# EAGLE board MCU (EAGLE 9.6.0)
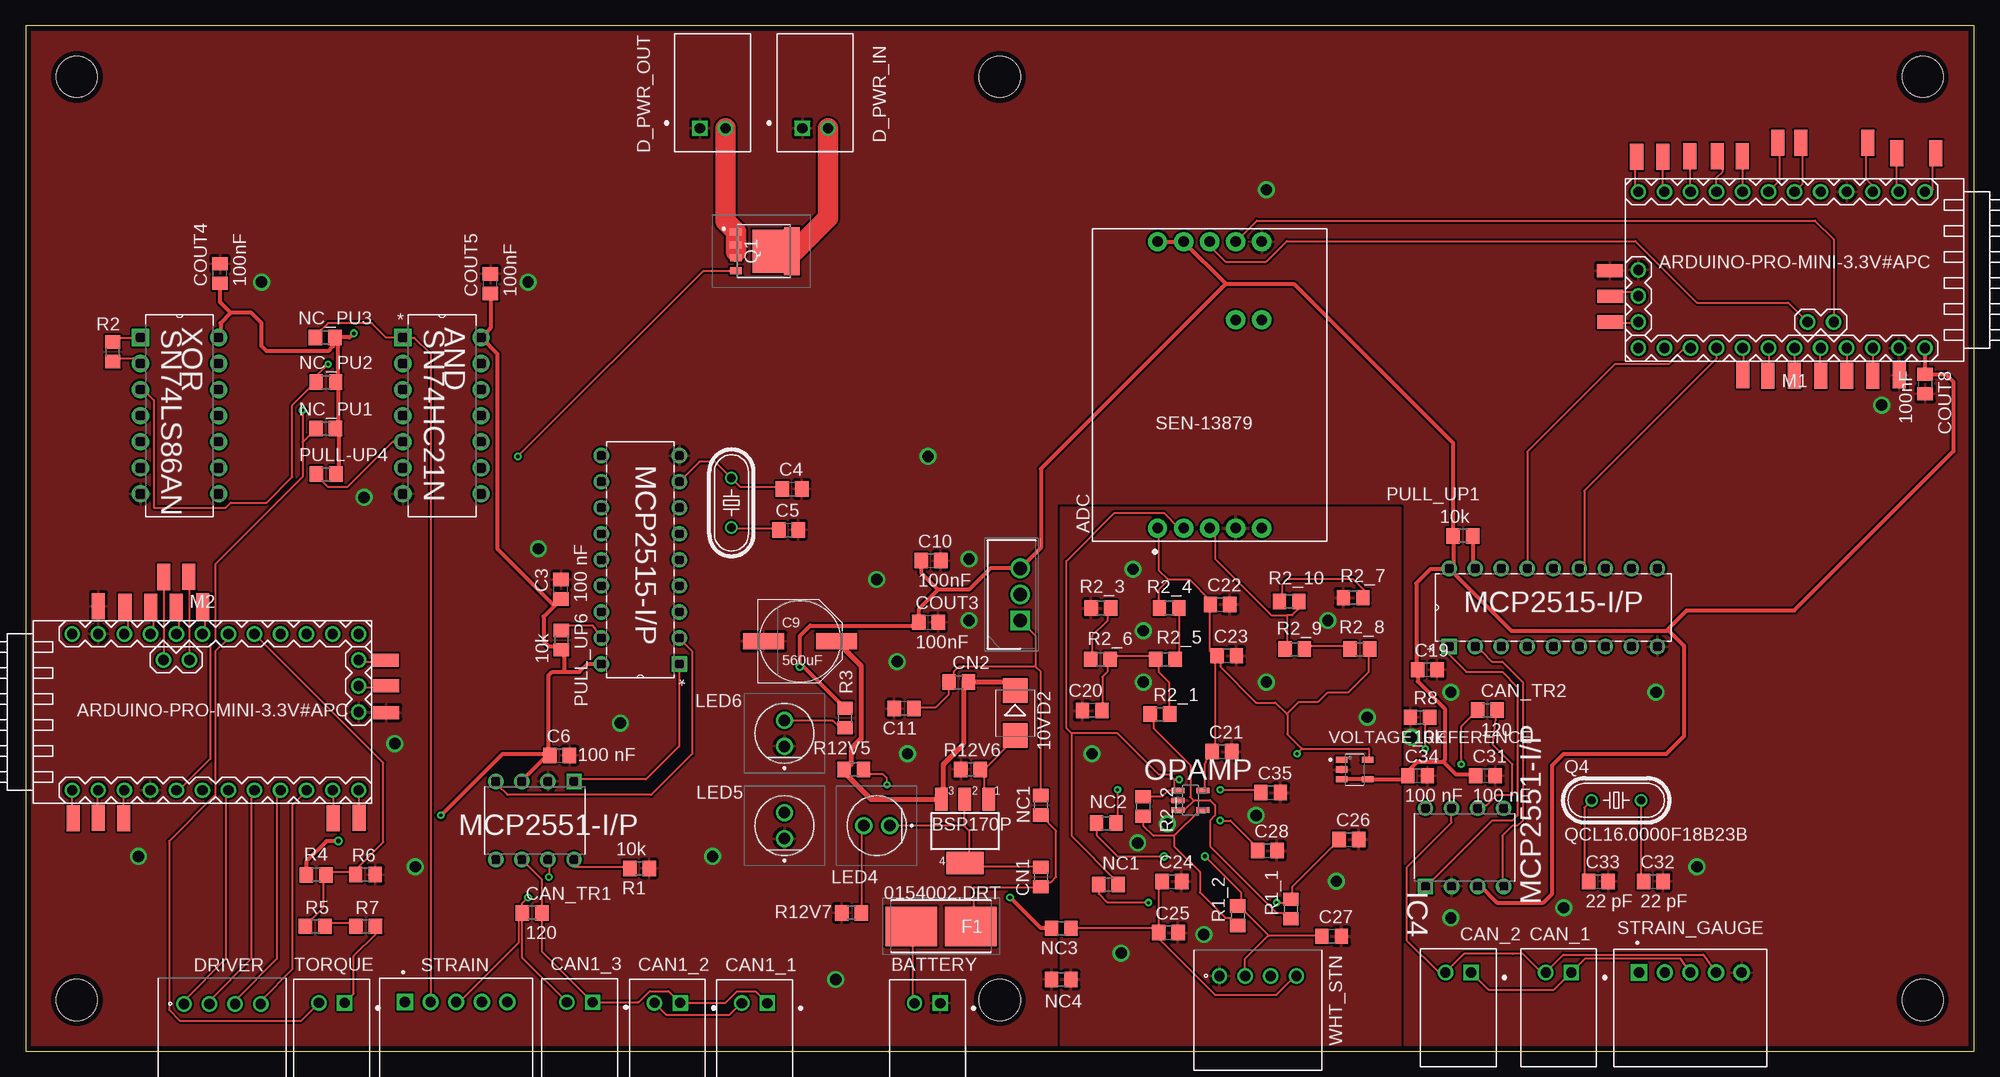
[diagram p0: board, top side]
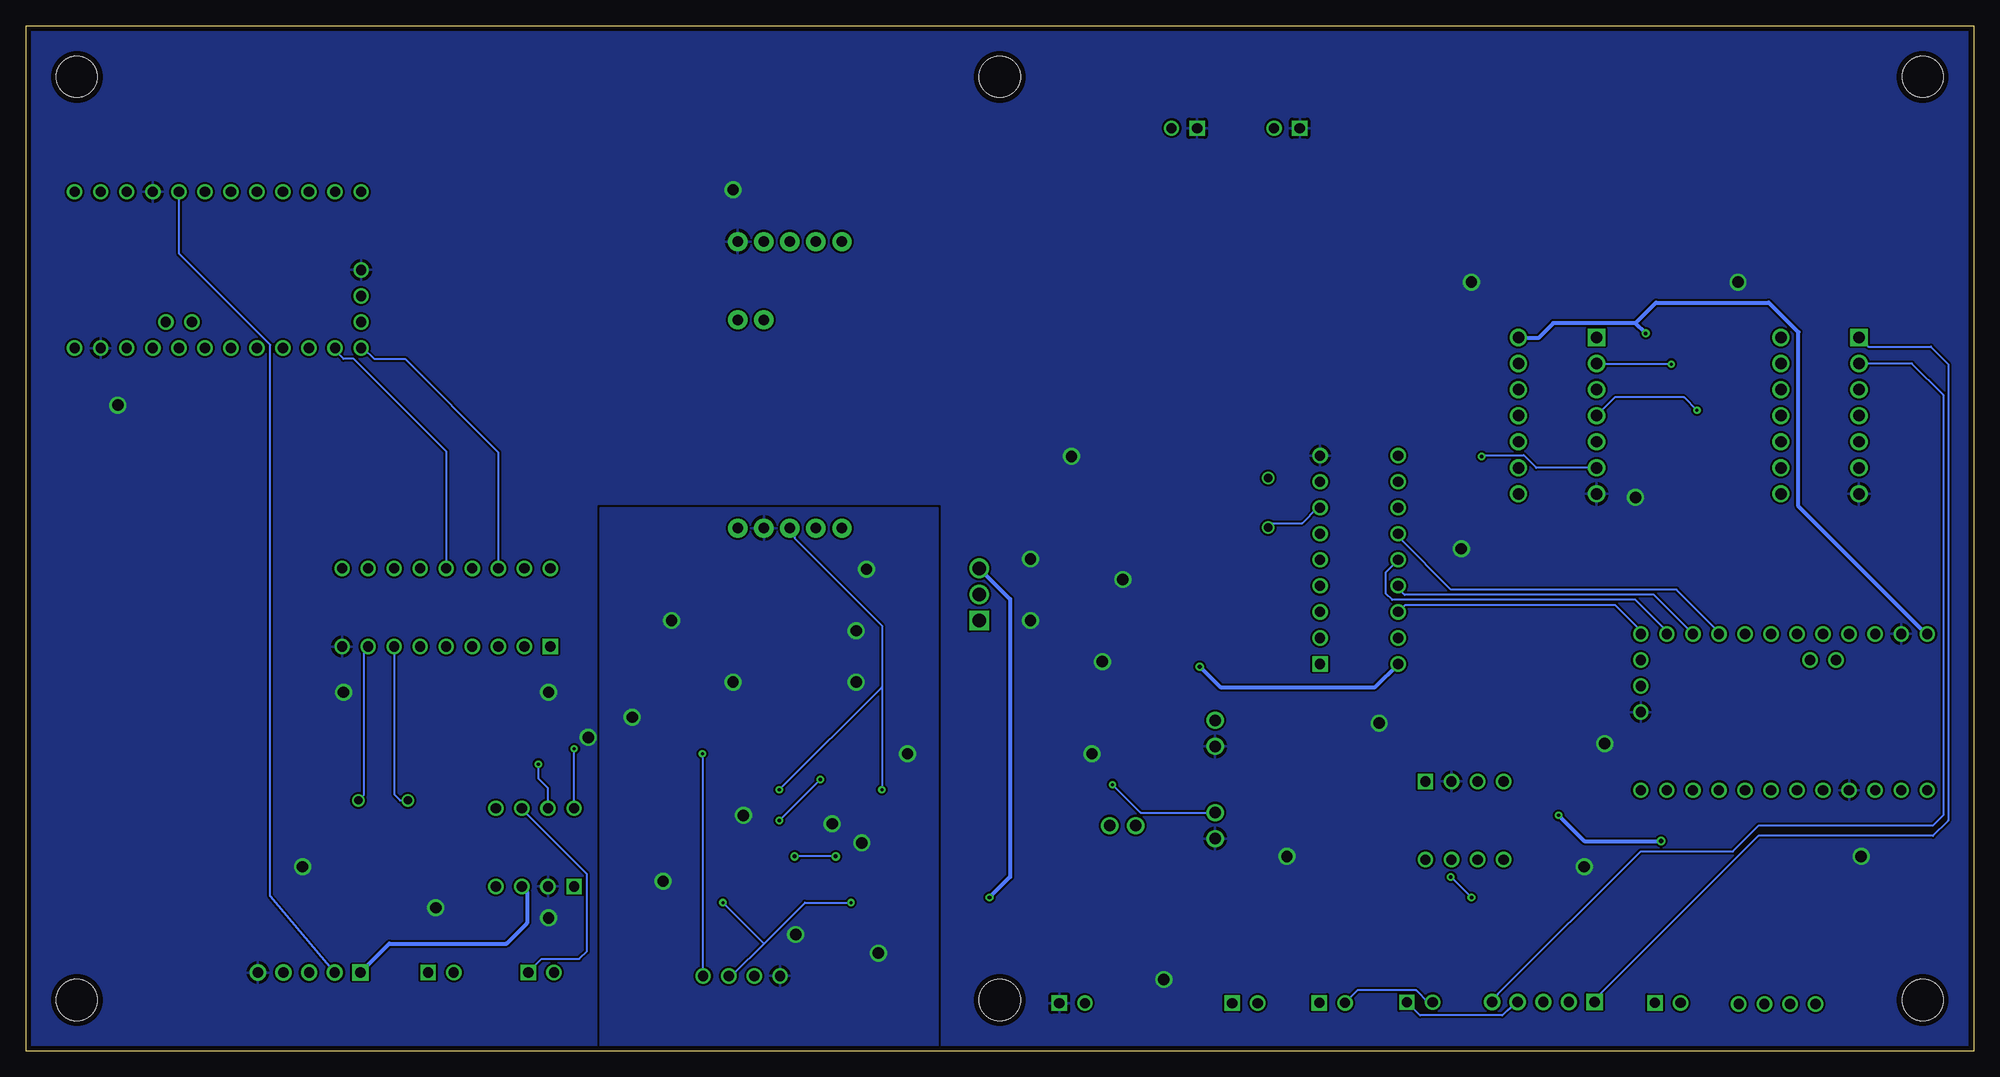
[diagram p1: board, bottom side, seen from below]

Size 190 x 100 mm. Coordinates in mm from the lower left corner, seen from the top.
Outline: 0,0 190,0 190,100 0,100 0,0
Copper layers (1*16): Top 0.035mm / dielectric 1.5mm / Bottom 0.035mm
Design rules "JLC_Vermilion2020": minimum track width 0.2mm, minimum drill 0.3mm, track to track 0.2mm, track to pad 0.3mm, pad to pad 0.3mm, via to via 0.2mm, smd to smd 0.2mm, copper to edge 0.5mm, drill to drill 0.25mm, minimum pad ring 0.2mm, minimum via ring 0.2mm, stop-mask expansion 0.055mm, vias tented up to drill 0.3mm, thermal gap 0.3mm
Net classes: 1 signal: width 0.3 mm, drill 0.4 mm, clearance 0.25 mm; 2 12V: width 1 mm, drill 1.1 mm, clearance 0.25 mm; 3 Driver Power: width 2 mm, drill 0.4 mm, clearance 0.5 mm
Holes 4 mm at 5,95 5,5 95,5 95,95 185,5 185,95

## Footprints (pad centres in the part's own frame; a part is rotated, then mirrored left to right if it is on the bottom)
SPARKFUN_SEN-13879 = drill 1.016 pad 1.88: 1 -13.97,5.08; 2 -13.97,2.54; 3 -13.97,0; 4 -13.97,-2.54; 5 -13.97,-5.08; 6 13.97,-5.08; 7 13.97,-2.54; 8 13.97,0; 9 13.97,2.54; 10 13.97,5.08; 11 6.35,-2.54; 12 6.35,-5.08
DIP254P762X508-14 = drill 1.118 square: 1 -7.62,15.24 | drill 1.118: 2 -7.62,12.7; 3 -7.62,10.16; 4 -7.62,7.62; 5 -7.62,5.08; 6 -7.62,2.54; 7 -7.62,0; 8 0,0; 9 0,2.54; 10 0,5.08; 11 0,7.62; 12 0,10.16; 13 0,12.7; 14 0,15.24
JST_S2B-XH-A(LF)(SN) = drill 1 square: 1 -1.25,0 | drill 1: 2 1.25,0
C0805 = smd 1.3 x 1.5: 1 -0.95,0; 2 0.95,0
PANASONIC_F = smd 4 x 1.6: + 3.55,0; - -3.55,0
R0805 = smd 1.3 x 1.5: 1 -0.95,0; 2 0.95,0
SMB = smd 2.4 x 2.4: A 2.2,0; C -2.2,0
S4B-XH-A(LF)(SN) = drill 1: 1 -0.02,3.75; 2 -0.02,1.25; 3 -0.02,-1.25; 4 -0.02,-3.75
FUSM9750X381N = smd 5.05 x 3.85: 1 -2.9,0; 2 2.9,0
DIP254P762X432-18 = drill 0.991 square: 1 -7.62,20.32 | drill 0.991: 2 -7.62,17.78; 3 -7.62,15.24; 4 -7.62,12.7; 5 -7.62,10.16; 6 -7.62,7.62; 7 -7.62,5.08; 8 -7.62,2.54; 9 -7.62,0; 10 0,0; 11 0,2.54; 12 0,5.08; 13 0,7.62; 14 0,10.16; 15 0,12.7; 16 0,15.24; 17 0,17.78; 18 0,20.32
DIP254P762X432-8 = drill 0.991 square: 1 -7.62,7.62 | drill 0.991: 2 -7.62,5.08; 3 -7.62,2.54; 4 -7.62,0; 5 0,0; 6 0,2.54; 7 0,5.08; 8 0,7.62
TO254P470X1028X1955-3P = drill 1.29 pad 1.935 square: 1 0,0 | drill 1.29 pad 1.935: 2 2.54,0; 3 5.08,0
TLHG5400 = drill 1.12 pad 1.68: 1 1.27,0; 2 -1.27,0
ARDUINO-PRO-MINI#APC = drill 1: J2.1 -1.27,5.08; J2.2 -3.81,5.08; J3.1 15.24,0; J3.2 15.24,2.54; J3.3 15.24,5.08; J6.1 -12.7,7.62; J6.2 -10.16,7.62; J6.3 -7.62,7.62; J6.4 -5.08,7.62; J6.5 -2.54,7.62; J6.6 0,7.62; J6.7 2.54,7.62; J6.8 5.08,7.62; J6.9 7.62,7.62; J6.10 10.16,7.62; J6.11 12.7,7.62; J6.12 15.24,7.62; J7.1 15.24,-7.62; J7.2 12.7,-7.62; J7.3 10.16,-7.62; J7.4 7.62,-7.62; J7.5 5.08,-7.62; J7.6 2.54,-7.62; J7.7 0,-7.62; J7.8 -2.54,-7.62; J7.9 -5.08,-7.62; J7.10 -7.62,-7.62; J7.11 -10.16,-7.62; J7.12 -12.7,-7.62
SOT95P284X119-5N = smd 1.27 x 0.533: 1 -1.219,0.94; 2 -1.219,0; 3 -1.219,-0.94; 4 1.219,-0.94; 5 1.219,0.94
SMD1,27-2,54 = smd 1.27 x 2.54: 1 0,0
PSMNR9040YLHX = smd 0.7 x 1.15: 1 -1.905,-2.737; 2 -0.635,-2.737; 3 0.635,-2.737; 4 1.905,-2.737 | smd 4.2 x 3.1: 5 0,0.437 | smd 4.7 x 1.5: 6 0,2.737
SOT223 = smd 1.219 x 2.235: 1 -2.311,-3.099; 2 0,-3.099; 3 2.311,-3.099 | smd 3.6 x 2.2: 4 0,3.099
HC49/S = drill 0.813: 1 -2.413,0; 2 2.413,0
JST_S5B-XH-A(LF)(SN) = drill 1 pad 1.59 square: 1 -5,0 | drill 1 pad 1.59: 2 -2.5,0; 3 0,0; 4 2.5,0; 5 5,0
SOT95P280X145-5N = smd 1.21 x 0.59: 1 -1.255,0.95; 2 -1.255,0; 3 -1.255,-0.95; 4 1.255,-0.95; 5 1.255,0.95

## Placement (x,y rotation side)
ADC  SEN-13879  [SPARKFUN_SEN-13879]  115.47,64.97 90 top
AND  SN74HC21N  [DIP254P762X508-14]  44.42,54.35 0 top
BATTERY  S2B-XH-A(LF)(SN)  [JST_S2B-XH-A(LF)(SN)]  87.94,4.69 180 top
C3  100 nF  [C0805]  52.2,45.04 90 top
C4  22 pF  [C0805]  74.74,54.84 0 top
C5  22 pF  [C0805]  74.39,50.84 0 top
C6  100 nF  [C0805]  52.09,28.84 0 top
C9  560uF  [PANASONIC_F]  75.52,39.98 0 top
C10  100nF  [C0805]  88.29,47.84 0 top
C11  0.33uF  [C0805]  85.66,33.42 180 top
C19  4.7uF  [C0805]  136.71,37.2 0 top
C20  100nF  [C0805]  104.02,33.22 180 top
C21  4.7uF  [C0805]  116.67,29.22 0 top
C22  4.7uF  [C0805]  116.49,43.57 0 top
C23  100nF  [C0805]  117.14,38.57 0 top
C24  4.7uF  [C0805]  111.79,16.57 0 top
C25  100nF  [C0805]  111.44,11.57 0 top
C26  100nF  [C0805]  129.06,20.67 0 top
C27  100nF  [C0805]  127.37,11.22 0 top
C28  100nF  [C0805]  121.09,19.57 0 top
C31  100 nF  [C0805]  142.37,26.87 0 top
C32  22 pF  [C0805]  158.74,16.57 0 top
C33  22 pF  [C0805]  153.39,16.57 0 top
C34  100 nF  [C0805]  135.75,26.87 0 top
C35  100nF  [C0805]  121.42,25.22 0 top
CAN1_1  S2B-XH-A(LF)(SN)  [JST_S2B-XH-A(LF)(SN)]  71.08,4.69 180 top
CAN1_2  S2B-XH-A(LF)(SN)  [JST_S2B-XH-A(LF)(SN)]  62.58,4.72 180 top
CAN1_3  S2B-XH-A(LF)(SN)  [JST_S2B-XH-A(LF)(SN)]  54.04,4.79 180 top
CAN_1  S2B-XH-A(LF)(SN)  [JST_S2B-XH-A(LF)(SN)]  149.5,7.69 180 top
CAN_2  S2B-XH-A(LF)(SN)  [JST_S2B-XH-A(LF)(SN)]  139.72,7.69 180 top
CAN_TR1  120  [R0805]  49.39,13.49 0 top
CAN_TR2  120  [R0805]  142.54,33.27 0 top
CN1  10k  [R0805]  99,17 270 top
CN2  10k  [R0805]  91,36 0 top
COUT3  100nF  [C0805]  88.04,41.83 0 top
COUT4  100nF  [C0805]  18.95,75.84 90 top
COUT5  100nF  [C0805]  45.33,74.84 90 top
COUT8  100nF  [C0805]  185.25,65.06 270 top
D2  10V  [SMB]  96.5,32.98 270 top
D_PWR_IN  S2B-XH-A(LF)(SN)  [JST_S2B-XH-A(LF)(SN)]  77,90 0 top
D_PWR_OUT  S2B-XH-A(LF)(SN)  [JST_S2B-XH-A(LF)(SN)]  67,90 0 top
DRIVER  S4B-XH-A(LF)(SN)  [S4B-XH-A(LF)(SN)]  19.18,4.62 90 top
F1  0154002.DRT  [FUSM9750X381N]  89.28,12.19 0 top
IC1  MCP2515-I/P  [DIP254P762X432-18]  56.14,58.08 180 top
IC2  MCP2551-I/P  [DIP254P762X432-8]  45.86,18.69 270 top
IC3  MCP2515-I/P  [DIP254P762X432-18]  159.14,47.08 90 top
IC4  MCP2551-I/P  [DIP254P762X432-8]  144.14,23.69 90 top
IC5  LM7805CT_NOPB  [TO254P470X1028X1955-3P]  97,42 90 top
LED4  TLHG5400  [TLHG5400]  83,22 0 top
LED5  TLHG5400  [TLHG5400]  74,22 270 top
LED6  TLHG5400  [TLHG5400]  74,31 270 top
M1  ARDUINO-PRO-MINI-3.3V#APC  [ARDUINO-PRO-MINI#APC]  172.52,76.18 180 top
M2  ARDUINO-PRO-MINI-3.3V#APC  [ARDUINO-PRO-MINI#APC]  17.24,33.07 0 top
NC1  10k  [R0805]  99,24 270 top
NC3  [R0805]  101,12 180 top
NC4  [R0805]  101,7 0 top
NC_PU1  10k  [R0805]  29.27,60.72 0 top
NC_PU2  10k  [R0805]  29.28,65.25 0 top
NC_PU3  10k  [R0805]  29.21,69.6 0 top
NO_CONNECTION  NC1  [R0805]  105.61,16.25 0 top
NO_CONNECTION_2  NC2  [R0805]  105.39,22.25 0 top
OPAMP  LMP7731MF  [SOT95P284X119-5N]  113.6,24.47 0 top
PAD1  [SMD1,27-2,54]  186.29,87.57 0 top
PAD2  [SMD1,27-2,54]  4.63,22.74 180 top
PAD3  [SMD1,27-2,54]  7.1,22.75 180 top
PAD4  [SMD1,27-2,54]  9.58,22.7 180 top
PAD5  [SMD1,27-2,54]  182.48,87.57 0 top
PAD6  [SMD1,27-2,54]  179.67,88.57 0 top
PAD7  [SMD1,27-2,54]  172.5,65.88 0 top
PAD8  [SMD1,27-2,54]  175.05,65.88 0 top
PAD9  [SMD1,27-2,54]  177.61,65.88 0 top
PAD10  [SMD1,27-2,54]  180.16,65.88 0 top
PAD11  [SMD1,27-2,54]  154.53,71.11 90 top
PAD12  [SMD1,27-2,54]  154.55,73.61 90 top
PAD13  [SMD1,27-2,54]  182.74,65.9 0 top
PAD14  [SMD1,27-2,54]  154.5,76.11 90 top
PAD15  [SMD1,27-2,54]  159.66,87.22 0 top
PAD16  [SMD1,27-2,54]  157.11,87.22 0 top
PAD17  [SMD1,27-2,54]  173.1,88.57 0 top
PAD18  [SMD1,27-2,54]  170.86,88.57 0 top
PAD19  [SMD1,27-2,54]  167.4,87.27 0 top
PAD20  [SMD1,27-2,54]  164.97,87.28 0 top
PAD21  [SMD1,27-2,54]  169.93,65.88 0 top
PAD22  [SMD1,27-2,54]  17.27,43.37 180 top
PAD23  [SMD1,27-2,54]  14.69,43.34 180 top
PAD24  [SMD1,27-2,54]  12.21,43.35 180 top
PAD25  [SMD1,27-2,54]  9.69,43.35 180 top
PAD26  [SMD1,27-2,54]  35.1,38.15 270 top
PAD27  [SMD1,27-2,54]  35.16,35.65 270 top
PAD28  [SMD1,27-2,54]  167.47,65.92 0 top
PAD29  [SMD1,27-2,54]  7.08,43.4 180 top
PAD30  [SMD1,27-2,54]  15.93,46.26 180 top
PAD31  [SMD1,27-2,54]  13.48,46.24 180 top
PAD32  [SMD1,27-2,54]  35.17,33.02 270 top
PAD33  [SMD1,27-2,54]  30.01,22.7 180 top
PAD34  [SMD1,27-2,54]  32.53,22.77 180 top
PAD35  [SMD1,27-2,54]  162.28,87.27 0 top
PULL-UP4  10k  [R0805]  29.3,56.27 0 top
PULL_UP1  10k  [R0805]  140.18,50.25 180 top
PULL_UP6  10k  [R0805]  52.26,40.09 270 top
Q1  PSMNR90-40YLHX  [PSMNR9040YLHX]  72,78 270 top
Q2  BSP170P  [SOT223]  91.61,21.47 180 top
Q3  QCL16.0000F18B23B  [HC49/S]  68.83,53.47 90 top
Q4  QCL16.0000F18B23B  [HC49/S]  155.12,24.47 0 top
R1  10k  [R0805]  59.86,17.84 180 top
R1_1  22  [R0805]  123.4,13.87 90 top
R1_2  22  [R0805]  118.22,13.22 90 top
R2  10k  [R0805]  8.49,68.19 90 top
R2_1  1.07M  [R0805]  110.61,32.87 0 top
R2_2  1.07M  [R0805]  108.99,23.87 270 top
R2_3  100k  [R0805]  104.87,43.22 0 top
R2_4  130k  [R0805]  111.52,43.22 180 top
R2_5  130k  [R0805]  111.17,38.22 0 top
R2_6  130k  [R0805]  104.82,38.22 0 top
R2_7  100k  [R0805]  129.47,44.22 0 top
R2_8  130k  [R0805]  130.12,39.22 0 top
R2_9  130k  [R0805]  123.77,39.22 0 top
R2_10  130k  [R0805]  123.23,43.87 0 top
R3  200  [R0805]  79.91,32.49 90 top
R4  1k  [R0805]  28.33,17.19 180 top
R5  1k  [R0805]  28.25,12.19 0 top
R6  100k  [R0805]  33.13,17.22 180 top
R7  10  [R0805]  33.17,12.19 0 top
R8  10k  [R0805]  135.99,32.57 0 top
R12V5  480  [R0805]  80.77,27.49 180 top
R12V6  10k  [R0805]  92.15,27.49 0 top
R12V7  480  [R0805]  80.53,13.49 0 top
STRAIN  S5B-XH-A(LF)(SN)  [JST_S5B-XH-A(LF)(SN)]  41.99,4.82 0 top
STRAIN_GAUGE  S5B-XH-A(LF)(SN)  [JST_S5B-XH-A(LF)(SN)]  162.36,7.67 0 top
TORQUE  S2B-XH-A(LF)(SN)  [JST_S2B-XH-A(LF)(SN)]  29.85,4.72 180 top
VOLTAGE_REFERENCE  LM4132BMF-4.1  [SOT95P280X145-5N]  129.61,27.47 0 top
WHT_STN  S4B-XH-A(LF)(SN)  [S4B-XH-A(LF)(SN)]  120.18,7.37 90 top
XOR  SN74LS86AN  [DIP254P762X508-14]  18.82,54.35 0 top

## Library data of the parts
ADC = SEN-13879; DESCRIPTION: External Input Sensor Amplifier; DIGI-KEY_PART_NUMBER: 1568-1436-ND; DIGI-KEY_PURCHASE_URL: https://www.digikey.com/product-detail/en/sparkfun-electronics/SEN-13879/1568-1436-ND/6202732?utm_source=snapeda&utm_medium=aggregator&utm_campaign=symbol; MF: SparkFun; MP: SEN-13879; PACKAGE: None
AND = SN74HC21N; AVAILABILITY: Unavailable; DESCRIPTION: AND Gate IC 2 Channel 14-PDIP; MF: Texas Instruments; MP: SN74HC21N; PACKAGE: DIP-14 Texas Instruments; PRICE: None
BATTERY CAN1_1-CAN1_3 CAN_1 CAN_2 D_PWR_IN D_PWR_OUT TORQUE = S2B-XH-A_LF__SN_; DESCRIPTION: Connector Header Through Hole, Right Angle 2 position 0.098 _2.50mm_; DIGI-KEY_PART_NUMBER: 455-2257-ND; DIGI-KEY_PURCHASE_URL: https://www.digikey.com/product-detail/en/jst-sales-america-inc/S2B-XH-A_LF__SN_/455-2257-ND/1651055?utm_source=snapeda&utm_medium=aggregator&utm_campaign=symbol; MF: JST Sales; MP: S2B-XH-A_LF__SN_; PACKAGE: None
C3-C6 C9-C11 C19-C28 C31-C35 COUT3-COUT5 COUT8 = rcl; SPICEPREFIX: C
CAN_TR1 CAN_TR2 CN1 CN2 NC1 NC3 NC4 NC_PU1-NC_PU3 NO_CONNECTION NO_CONNECTION_2 PULL-UP4 PULL_UP1 PULL_UP6 R1 R1_1 R1_2 R2 R2_1-R2_10 R3-R8 R12V5-R12V7 = rcl; SPICEPREFIX: R
D2 = diode
DRIVER WHT_STN = S4B-XH-A_LF__SN_; AVAILABILITY: Unavailable; DESCRIPTION: Connector Header Through Hole, Right Angle 4 position 0.098 _2.50mm_; MF: JST Sales; MP: S4B-XH-A_LF__SN_; PACKAGE: None; PRICE: None
F1 = 0154002.DRT; DESCRIPTION: Littelfuse 2A T Surface Mount Fuse, 125V ac/dc; HEIGHT: 3.81mm; MANUFACTURER_NAME: LITTELFUSE; MANUFACTURER_PART_NUMBER: 0154002.DRT; MOUSER_PART_NUMBER: 576-0154002.DRT; MOUSER_PRICE-STOCK: https://www.mouser.co.uk/ProductDetail/Littelfuse/0154002DRT?qs=2VFNtWizgicDQ8R7JxIsmA%3D%3D
IC1 IC3 = MCP2515-I_P; AVAILABILITY: Unavailable; DESCRIPTION: MCP2515 Series 5.5 V 1 Mb/s Stand Alone SPI Interface CAN Controller - PDIP-18; MF: Microchip; MP: MCP2515-I/P; PACKAGE: DIP-18 Microchip; PRICE: None
IC2 IC4 = MCP2551-I_P; AVAILABILITY: Unavailable; DESCRIPTION: MCP2551 Series 5.5 V 1 Mb/s Surface Mount High-Speed CAN Transceiver - PDIP-8; MF: Microchip; MP: MCP2551-I/P; PACKAGE: DIP-8 Microchip; PRICE: None
IC5 = LM7805CT_NOPB; DESCRIPTION: 1.5-A, Wide VIN Fixed Voltage Regulators; HEIGHT: 4.7mm; MANUFACTURER_NAME: Texas Instruments; MANUFACTURER_PART_NUMBER: LM7805CT/NOPB; MOUSER_PART_NUMBER: 926-LM7805CT/NOPB; MOUSER_PRICE-STOCK: https://www.mouser.co.uk/ProductDetail/Texas-Instruments/LM7805CT-NOPB?qs=OYMYEaN9QmBS2GvaX6GSkQ%3D%3D
LED4-LED6 = TLHG5400; DESCRIPTION: Vishay TLHG5400, 575 nm Green LED, 5mm (T-1 3/4) Round Through Hole package; HEIGHT: 9mm; MANUFACTURER_NAME: Vishay; MANUFACTURER_PART_NUMBER: TLHG5400; MOUSER_PART_NUMBER: 78-TLHG5400; MOUSER_PRICE-STOCK: https://www.mouser.com/Search/Refine.aspx?Keyword=78-TLHG5400
M1 M2 = diy-modules
OPAMP = LMP7731MF; AVAILABILITY: Unavailable; DESCRIPTION: Ic Amp Prec Rrio Ln Sgl Sot23-5 - Lmp7731mf/Nopb; MF: Texas Instruments; MP: LMP7731MF; PACKAGE: SOT-23 Texas Instruments; PRICE: None
PAD1-PAD35 = wirepad
Q1 = PSMNR90-40YLHX; DESCRIPTION: MOSFET N-CH 40 V LOGIC LEVEL; HEIGHT: 1.1mm; MANUFACTURER_NAME: Nexperia; MANUFACTURER_PART_NUMBER: PSMNR90-40YLHX; MOUSER_PART_NUMBER: 771-PSMNR90-40YLHX; MOUSER_PRICE-STOCK: https://www.mouser.com/Search/Refine.aspx?Keyword=771-PSMNR90-40YLHX
Q2 = transistor-fet
Q3 Q4 = adafruit; OC_FARNELL: 1667008; OC_NEWARK: unknown
STRAIN STRAIN_GAUGE = S5B-XH-A_LF__SN_; AVAILABILITY: Unavailable; DESCRIPTION: Connector Header Through Hole, Right Angle 5 position 0.098 _2.50mm_; MF: JST Sales; MP: S5B-XH-A_LF__SN_; PACKAGE: None; PRICE: None
VOLTAGE_REFERENCE = LM4132BMF-4.1; AVAILABILITY: Unavailable; DESCRIPTION: Series Voltage Reference IC ±0.1% SOT-23-5; MF: Texas Instruments; MP: LM4132BMF-4.1; PACKAGE: SOT-23 Texas Instruments; PRICE: None
XOR = SN74LS86AN; AVAILABILITY: Unavailable; DESCRIPTION: XOR _Exclusive OR_ IC 4 Channel 14-SOP; MF: Texas Instruments; MP: SN74LS86AN; PACKAGE: DIP-14 Texas Instruments; PRICE: None

## Nets
+5V: ADC.9 ADC.10 AND.14 C3.1 C6.1 C10.1 C19.1 C31.1 C34.1 COUT3.1 COUT4.1 COUT5.1 COUT8.1 IC1.18 IC2.3 IC3.18 IC4.3 IC5.3 M1.J6.1 M2.J6.1 NC3.2 NC_PU1.2 NC_PU2.2 NC_PU3.2 PULL-UP4.2 PULL_UP1.2 PULL_UP6.2 R3.2 R4.2 STRAIN_GAUGE.1 VOLTAGE_REFERENCE.3 VOLTAGE_REFERENCE.4 XOR.14
+12V: C9.+ CN2.2 D2.C Q2.3 R12V5.2
CANH1: CAN1_1.2 CAN1_2.2 CAN1_3.2 CAN_TR1.1 IC2.7 STRAIN.3
CANH2: CAN_1.2 CAN_2.2 CAN_TR2.1 IC4.7 STRAIN_GAUGE.4
CANL1: CAN1_1.1 CAN1_2.1 CAN1_3.1 CAN_TR1.2 IC2.6 STRAIN.4
CANL2: CAN_1.1 CAN_2.1 CAN_TR2.2 IC4.6 STRAIN_GAUGE.3
DRAIN [Driver Power]: D_PWR_IN.2 Q1.5 Q1.6
DRIVER_ALERT_AL: AND.5 PULL-UP4.1
GND: ADC.6 AND.7 BATTERY.1 C3.2 C4.2 C5.2 C6.2 C9.- C10.2 C11.2 C19.2 C31.2 C32.2 C33.2 C34.2 COUT3.2 COUT4.2 COUT5.2 COUT8.2 D_PWR_IN.1 D_PWR_OUT.1 IC1.9 IC2.2 IC3.9 IC4.2 LED5.1 LED6.1 M1.J3.1 M1.J6.2 M1.J7.9 M2.J3.1 M2.J6.2 M2.J7.9 NC4.1 PAD13.1 PAD14.1 PAD29.1 PAD32.1 R1.1 R6.1 R8.1 R12V6.1 R12V7.1 STRAIN_GAUGE.5 XOR.7
GNDA: ADC.4 C20.2 C21.2 C22.2 C23.2 C24.2 C25.2 C26.2 C27.2 C28.2 C35.2 NC4.2 OPAMP.2 R2_3.1 R2_7.1 VOLTAGE_REFERENCE.2 WHT_STN.1
MCU_ALERT_AL: AND.4 M2.J7.8 NC_PU1.1
N$1: LED4.2 R12V7.2
N$2: DRIVER.4 M2.J7.3
N$3: M2.J7.12 PAD2.1
N$4: M2.J7.11 PAD3.1
N$5: D2.A Q2.1 R12V6.2
N$6: BATTERY.2 F1.1
N$7: CN1.1 LED4.1 Q2.2 Q2.4
N$8: M2.J7.10 PAD4.1
N$9: DRIVER.1 M2.J7.6
N$10: M2.J6.6 PAD22.1
N$11: M2.J6.5 PAD23.1
N$12: M2.J6.4 PAD24.1
N$13: IC1.15 M2.J6.10
N$14: M2.J6.3 PAD25.1
N$15: DRIVER.2 M2.J7.5
N$16: R5.2 R7.1
N$17: M2.J3.3 PAD26.1
N$18: LED5.2 R12V5.1
N$19: LED6.2 R3.1
N$20: IC1.13 M2.J6.9
N$21: IC1.14 M2.J6.11
N$22: IC1.16 M2.J6.12
N$23: DRIVER.3 M2.J7.4
N$24: CN1.2 F1.2 NC1.2
N$25: C11.1 CN2.1 IC5.1 NC1.1
N$27: C20.1 R2_1.2 R2_5.1 R2_6.2
N$28: ADC.2 C28.1 NO_CONNECTION.2 OPAMP.1 R2_2.1
N$29: OPAMP.4 R1_2.1 R2_2.2
N$30: OPAMP.3 R1_1.1 R2_1.1
N$31: R2_3.2 R2_6.1
N$32: M1.J7.12 PAD1.1
N$33: M1.J7.11 PAD5.1
N$34: M1.J7.10 PAD6.1
N$35: R2_4.1 R2_5.2
N$36: M1.J6.7 PAD21.1
N$37: M1.J6.6 PAD7.1
N$38: M1.J6.5 PAD8.1
N$39: M1.J6.4 PAD9.1
N$40: M2.J3.2 PAD27.1
N$41: M1.J6.3 PAD10.1
N$42: M2.J2.1 PAD30.1
N$43: M1.J3.3 PAD11.1
N$44: M1.J3.2 PAD12.1
N$45: M1.J6.8 PAD28.1
N$46: M1.J7.2 PAD15.1
N$47: M1.J7.1 PAD16.1
N$48: IC3.17 PULL_UP1.1
N$49: M2.J2.2 PAD31.1
N$50: C32.1 IC3.8 Q4.2
N$51: C33.1 IC3.7 Q4.1
N$52: IC4.8 R8.2
N$53: IC3.2 IC4.4
N$54: M2.J7.2 PAD33.1
N$55: M2.J7.1 PAD34.1
N$56: IC1.17 PULL_UP6.1
N$57: IC3.1 IC4.1
N$58: C4.1 IC1.8 Q3.2
N$59: C5.1 IC1.7 Q3.1
N$60: IC2.8 R1.2
N$61: IC3.15 M1.J6.10
N$62: IC1.2 IC2.4
N$63: R2.2 STRAIN.1 XOR.1
N$65: IC3.13 M1.J6.9
N$66: IC3.14 M1.J6.11
N$67: R2.1 STRAIN.5 XOR.2
N$68: IC1.1 IC2.1
N$69: IC3.16 M1.J6.12
N$70: ADC.7 M1.J2.2
N$71: ADC.8 M1.J2.1
N$72: R2_8.1 R2_9.2
N$73: R2_7.2 R2_10.1
N$74: M1.J7.7 PAD17.1
N$75: M1.J7.6 PAD18.1
N$76: M1.J7.5 PAD19.1
N$77: M1.J7.4 PAD20.1
N$78: M1.J7.3 PAD35.1
N$79: C27.1 NO_CONNECTION_2.1 R1_2.2 WHT_STN.2
N$82: ADC.3 C35.1 NO_CONNECTION_2.2 R2_9.1 R2_10.2
N$83: ADC.1 C21.1 C22.1 C23.1 C24.1 C25.1 NC3.1 OPAMP.5 R2_4.2 R2_8.2 VOLTAGE_REFERENCE.5 WHT_STN.4
PWR_SWITCH: AND.6 Q1.4
SG_ALER_AL: M1.J7.8 STRAIN_GAUGE.2
SOURCE [Driver Power]: D_PWR_OUT.2 Q1.1 Q1.2
TORQUE_I_OUT: M2.J6.7 TORQUE.2
TORQUE_V_OUT_[0/+5]: M2.J6.8 R4.1 R5.1 R6.2
TORQUE_V_OUT_[-5/+5]: R7.2 TORQUE.1
TS_DISCONNECT: AND.2 NC_PU2.1 XOR.3
TS_OOR: AND.1 NC_PU3.1 STRAIN.2
VCCINT4: C26.1 NO_CONNECTION.1 R1_1.2 WHT_STN.3

## Tracks (layer width: path | path; a pad name or v marks a point on that pad's centre or on a via)
+5V  (via drill 0.3, 0.35, 0.4)
  Top 0.2: PULL-UP4.2 30.27,56.27 30.54,56.53 | 30.54,60.66 30.47,60.72 NC_PU1.2 30.22,60.78 30.54,61.09
  Top 0.4: 30.54,61.09 30.54,64.97 NC_PU2.2 30.5,65.5 30.5,69.5 NC_PU3.2 | 30.54,60.66 30.54,56.53 | 52.5,37 52.5,39 PULL_UP6.2 52,39.5 51,39.5 50.5,40 50.5,42.38 C3.1 51.5,43.5 46,49 46,68 44.5,69.5 AND.14 45.33,70.5 COUT5.1 | 52.5,37 51.35,37 51,36.65 51,29 | v30.5,20.5 29.36,20.5 27.38,18.52 R4.2 | 52.5,37 54,37 54.76,37.76 IC1.18 | NC_PU3.2 30,69.44 30,68.78 29.48,68.27 23.49,68.27 23,68.76 23,71 22,72 20,72 | 51,29 48.5,26.5 IC2.3 | 51,29 C6.1 | VOLTAGE_REFERENCE.3 128.5,26.5 130.5,26.5 VOLTAGE_REFERENCE.4 134.45,26.52 C34.1 134.8,27.32 135.73,28.25 138.25,28.25 | C31.1 141,27 139.5,27 138.25,28.25 | IC4.3 141.93,16.07 143.5,14.5 148,14.5 148.87,15.37 148.87,27.87 150,29 160,29 161.74,30.74 161.74,39.52 160.25,41 160,41 | M1.J6.1 185.22,66.04 COUT8.1 187.25,66.01 188,65.26 188,58.5 172.5,43 162,43 160,41 | R3.2 75.85,37.5 v75.5,37.5 75.5,40.5 76.5,41.5 87,41.5 COUT3.1 87.09,43.09 89,45 | v40.5,23 46.5,29 51,29 | v32,70 31.6,69.6 NC_PU3.2 | 160,41 144.9,41 IC3.18 | 89,45 92,45 94.08,47.08 IC5.3 99,49.08 99,56.79 117.04,74.83 | C10.1 87.34,46.66 89,45 | NC3.2 99,12 v96,15 | ADC.10 ADC.9 117.04,74.83 | 117.04,74.83 123.67,74.83 139.23,59.27 PULL_UP1.2 139.23,47.49 IC3.18 | 138.25,28.25 138.41,28.41 138.41,33.41 135.75,36.07 C19.1 135.61,37.35 135.61,45.61 137,47 138.74,47 IC3.18 | 20,72 19,71 19,69.77 XOR.14 | 20,72 18.95,73.05 COUT4.1
  Bottom 0.4: M2.J6.1 5,41 17.12,53.12 17.12,70.12 20,73 31,73 33,71 | AND.14 42.42,69.59 41.01,71 33,71 | v30.5,20.5 38,20.5 v40.5,23 | v75.5,37.5 73.5,35.5 58.4,35.5 IC1.18 | IC4.3 141.11,15.58 141.11,12.49 143.1,10.5 154.53,10.5 STRAIN_GAUGE.1 | v96,15 94,17 94,44.08 IC5.3 | v32,70 33,71
+12V
  Top 0.5: D2.C 96.5,36 CN2.2 91.5,36 91.5,30 89.5,28 89.5,25 Q2.3 82.43,24.57 82,25 80,27 R12V5.2 80,27.5 80.5,28 80.5,29.5 81.5,30.5 81.5,37.55 C9.+
CANH1  (via drill 0.35)
  Top 0.2: STRAIN.3 42.31,4.82 48.06,10.56 48.06,13.11 CAN_TR1.1 | CAN_TR1.1 48.44,14.44 v49,15 | v51.02,17 51.07,17.05 51.07,18.56 IC2.7 | CAN_TR1.1 48.44,9.14 CAN1_3.2 | CAN1_1.2 69.77,4.69 68.66,3.57 62.48,3.57 CAN1_2.2
  Bottom 0.2: v49,15 51,17 v51.02,17 | CAN1_3.2 53.23,4.79 54.38,5.94 60.12,5.94 CAN1_2.2
CANH2  (via drill 0.3)
  Top 0.2: CAN_TR2.1 140,31.67 v140,28 | STRAIN_GAUGE.4 163.59,9.43 149.99,9.43 CAN_1.2 147.81,7.69 146,9.5 145,9.5 140.28,9.5 CAN_2.2 137.81,7.69 134.73,10.77 134.73,17.96 139.06,22.29 IC4.7
  Bottom 0.2: v140,28 140,26.6 139.06,25.66 IC4.7
CANL1
  Top 0.2: IC2.6 50.34,16.75 CAN_TR1.2 50.34,9.74 CAN1_3.1 59.77,4.79 60.86,5.87 62.68,5.87 CAN1_2.1 68.24,4.72 69.36,5.84 71.19,5.84 CAN1_1.1
  Bottom 0.2: STRAIN.4 45.49,4.01 46,3.5 54.01,3.5 CAN1_3.1
CANL2
  Top 0.2: CAN_TR2.2 143.09,29.91 145,28 145,25 143.5,25 142.5,24 142,24 IC4.6 | STRAIN_GAUGE.3 161.4,9 152.06,9 CAN_1.1 149.06,6 142.66,6 CAN_2.1
  Bottom 0.2: IC4.6 141.5,23.5 135.25,17.25 135.25,9.75 136,9 139.66,9 CAN_2.1
DRAIN
  Top 2: D_PWR_IN.2 78.25,81.25 74.74,77.74 Q1.6 Q1.5
DRIVER_ALERT_AL
  Top 0.2: AND.5 35.8,59.43 31.37,55 29.5,55 28.35,56.15 PULL-UP4.1
GND  (via drill 1.1)
  Top 0.2: 134.5,32.5 134.56,32.47
  other vias: 88,58 139,35 135.13,30.61 83,46 92,48 92,42 85,38 86,29 79,7 67,19 58,32 38,18 36,30 11,19 23,75 33,54 49,75 50,49 121,84 181,63 159,35 163,18 150,14 139,13
  pour Top (rank 6): -7,105 -7,-5 -4,-8 196,-8 197,-7 198,-6 198,107 -5,107
  pour Bottom (rank 6): -8,109 -10,107 -10,-7 -4,-13 87,-13 202,-13 207,-8 207,103 197,113 -4,113
GNDA  (via drill 1.1)
  other vias: 108,47 121,36 104,29 109,36 109,41 127,42 120,23 108.46,20.32 106.84,9.57 127.84,16.57 130.84,32.57 111.34,22.18 114.9,11.38
  pour Bottom: 101,53 134,53 134,0 101,0
  pour Top: 101,53 134,53 134,0 101,0
MCU_ALERT_AL  (via drill 0.3)
  Top 0.2: NC_PU1.1 27,59.4 v27,62.5 27,56 18.5,47.5 18.5,40 18,39.5 18,28.5 15,25.5 M2.J7.8
  Bottom 0.2: AND.4 35.02,63.75 28.25,63.75 v27,62.5
N$1
  Top 0.2: R12V7.2 81.5,13.5 81.5,22 LED4.2
N$2
  Top 0.2: DRIVER.4 23,5 26,8 26,24 27,25 M2.J7.3
N$3
  Top 0.2: PAD2.1 4.5,23 4.5,25 M2.J7.12
N$4
  Top 0.2: PAD3.1 7,23 7,25 M2.J7.11
N$5
  Top 0.2: Q2.1 93.5,25 93.5,27 R12V6.2 93.5,27.5 96.5,30.5 D2.A
N$6
  Top 0.2: BATTERY.2 86.5,5 86.5,12 F1.1
N$7
  Top 0.2: 92,18 99,18 CN1.1 | 92,18 Q2.4 | 91.5,22 LED4.1 | 91.5,22 91.75,21.75 92,21.5 92,18 | 91.5,22 91.5,24.45 Q2.2
N$8
  Top 0.2: PAD4.1 9.5,23 9.5,25 M2.J7.10
N$9
  Top 0.2: DRIVER.1 15.5,5 19.5,9 19.5,25 M2.J7.6
N$10
  Top 0.2: PAD22.1 17.5,43 17.5,41 M2.J6.6
N$11
  Top 0.2: PAD23.1 15,43 15,41 M2.J6.5
N$12
  Top 0.2: PAD24.1 12.5,43 12.5,41 M2.J6.4
N$13
  Bottom 0.2: M2.J6.10 31.21,44.5 55.51,44.5 56.14,45.13 IC1.15
N$14
  Top 0.2: PAD25.1 10,43 10,41 M2.J6.3
N$15
  Top 0.2: DRIVER.2 18,5 22,9 22,25 M2.J7.5
N$16
  Top 0.2: R5.2 29.5,12.5 32,12.5 R7.1
N$17
  Top 0.2: PAD26.1 35,38 32.5,38 M2.J3.3
N$18  (via drill 0.3)
  Top 0.2: v84,26 84,26.62 83.62,27 82,27 R12V5.1
  Bottom 0.2: LED5.2 81.27,23.27 v84,26
N$19
  Top 0.2: LED6.2 78.71,32.27 79.44,31.54 R3.1
N$20
  Bottom 0.2: IC1.13 56,50 51,45 29,45 25,41 M2.J6.9
N$21
  Bottom 0.2: IC1.14 57.39,46.67 57.39,44.67 56.73,44.01 33.01,44.01 30,41 M2.J6.11
N$22
  Bottom 0.2: IC1.16 55.46,43.52 35.02,43.52 32.5,41 M2.J6.12
N$23
  Top 0.2: DRIVER.3 20.5,5 24.5,9 24.5,25 M2.J7.4
N$24
  Top 0.2: F1.2 92.5,12.5 92.5,16 99,16 CN1.2 99,16.5 100,16.5 100.5,17 100.5,21.5 99,23 NC1.2
N$25
  Top 0.2: C11.1 87,33.5 88.75,33.5 90,34.76 90,36 CN2.1 90.5,36 90.5,37 91,37.5 98.5,37.5 | 98.5,37.5 98.5,40.5 IC5.1 | NC1.1 99,37 98.5,37.5
N$27
  Top 0.2: C20.1 105,33.5 105,36.5 105.5,37 105.5,38 R2_6.2 106,38.5 110,38.5 R2_5.1 110.5,38 110.5,37 111.5,36 111.5,33 R2_1.2
N$28  (via drill 0.3)
  Top 0.2: 112,26.5 111.5,27 110.5,27 106.5,31 102,31 | 112,26.5 112,25.5 OPAMP.1 111.41,25.41 110.82,24.82 R2_2.1 | 102,31 102,21 106.5,16.5 NO_CONNECTION.2 | v116.5,22.5 117.5,22.5 120,20 C28.1 | 112,26.5 v112.5,26.5 | 102,31 101.5,31.5 101.5,47.8 106.2,52.5 111,52.5 112.5,51 ADC.2
  Bottom 0.2: v112.5,26.5 v116.5,22.5
N$29
  Top 0.2: R1_2.1 118,12.5 117.5,13 117,13 114.5,15.5 114.5,17.5 112,20 112,21 | OPAMP.4 114.79,23.5 114.5,23.5 112,21 | 112,21 110,21 108.99,22.01 R2_2.2
N$30
  Top 0.2: R2_1.1 110,32.5 110,31.5 113.59,27.91 113.59,24.78 113.87,24.5 114,24.5 | 114,24.5 115.5,24.5 116,24 116,23 115.5,22.5 115.5,20 122,13.5 122.5,13.5 123,13 R1_1.1 | OPAMP.3 113.03,23.53 114,24.5
N$31
  Top 0.2: R2_6.1 104,38.5 104,40.5 105.5,42 105.5,43 R2_3.2
N$32
  Top 0.2: PAD1.1 186,87.5 186,84 185.5,84 M1.J7.12
N$33
  Top 0.2: PAD5.1 182.5,87.5 182.5,84 M1.J7.11
N$34
  Top 0.2: PAD6.1 179.5,88.5 179.5,85 180.5,84 M1.J7.10
N$35
  Top 0.2: R2_5.2 112.5,38.5 112.5,43 R2_4.1
N$36
  Top 0.2: PAD21.1 170,65.94 170,68.5 M1.J6.7
N$37
  Top 0.2: PAD7.1 172.5,68.5 M1.J6.6
N$38
  Top 0.2: M1.J6.5 174.99,68.49 174.99,65.94 PAD8.1
N$39
  Top 0.2: PAD9.1 177.6,65.89 M1.J6.4
N$40
  Top 0.2: PAD27.1 35,35.5 32.5,35.5 M2.J3.2
N$41
  Top 0.2: PAD10.1 180.14,65.88 M1.J6.3
N$42
  Top 0.2: PAD30.1 16,46 16,38.5 M2.J2.1
N$43
  Top 0.2: PAD11.1 154.64,71 157,71 M1.J3.3
N$44
  Top 0.2: PAD12.1 155.28,74 157,74 M1.J3.2
N$45
  Top 0.2: PAD28.1 167.5,65.94 167.5,68.5 M1.J6.8
N$46
  Top 0.2: M1.J7.2 159.66,83.96 PAD15.1
N$47
  Top 0.2: M1.J7.1 157.01,84 157.01,87 157,87 PAD16.1
N$48
  Top 0.4: PULL_UP1.1 141.13,47.31 IC3.17
N$49
  Top 0.2: PAD31.1 13.5,46 13.5,38.5 M2.J2.2
N$50
  Top 0.2: C32.1 157.5,17 157.5,24 Q4.2
  Bottom 0.2: IC3.8 157,39 157,25 Q4.2
N$51
  Top 0.2: C33.1 152,17 152,23.76 Q4.1
  Bottom 0.2: IC3.7 154,39 154,25 153.5,24.5 153.5,24.47 Q4.1
N$52  (via drill 0.3)
  Top 0.2: v136.5,29.5 136.5,32.06 R8.2
  Bottom 0.2: v136.5,29.5 136.5,24 IC4.8
N$53
  Top 0.2: IC4.4 144,16.5 144,21 145,22 145.5,22 146,22.5 146,36 144,38 143,38 142,39 141.5,39 IC3.2
N$54
  Top 0.2: PAD33.1 30,23 30,25 M2.J7.2
N$55
  Top 0.2: PAD34.1 32.5,23 32.5,25 M2.J7.1
N$56
  Top 0.2: PULL_UP6.1 52.72,41.5 55.3,41.5 IC1.17
N$57
  Top 0.2: IC4.1 137,16.5 143,22.5 145,22.5 145.5,23 145.5,35.5 144,37 140.5,37 138.5,39 IC3.1
N$58
  Top 0.2: C4.1 73.5,55 69.71,55 Q3.2 67.21,57.5 65.72,57.5 IC1.8
N$59
  Top 0.2: C5.1 73,51 69,51 Q3.1
  Bottom 0.2: IC1.7 64,53 65.5,51.5 68.5,51.5 Q3.1
N$60
  Top 0.2: R1.2 58.5,18 53.5,18 53.5,18.5 IC2.8
N$61
  Top 0.2: IC3.15 146.44,58.44 155,67 160.25,67 161.75,68.53 161.72,68.56 M1.J6.10
N$62
  Top 0.2: IC2.4 46,26 47,25 61,25 65,29 65,39 64,40 IC1.2
N$63
  Top 0.2: R2.2 8.5,69.5 11,69.5 XOR.1
  Bottom 0.2: STRAIN.1 36.41,5.59 21,21 4,21 2.5,22.5 2.5,67 4.2,68.69 10.3,68.69 XOR.1
N$65
  Top 0.2: IC3.13 152,47.5 152,54.63 164.9,67.53 M1.J6.9
N$66
  Bottom 0.2: IC3.14 148.98,58.48 158,67.5 159,67.5 159.82,68.32 M1.J6.11
N$67
  Top 0.2: R2.1 8.5,67.5 11,67.5 XOR.2
  Bottom 0.2: STRAIN.5 46.41,5.59 32.5,19.5 23.5,19.5 21,22 4,22 3,23 3,64 6.05,67.05 XOR.2
N$68
  Top 0.2: IC1.1 63.74,37.74 63.74,29.74 60.5,26.5 53.5,26.5 IC2.1
N$69
  Bottom 0.2: IC3.16 143.9,58.4 153,67.5 156,67.5 157.06,68.56 M1.J6.12
N$70
  Top 0.2: ADC.7 120.07,81 174.5,81 176.33,79.17 M1.J2.2
N$71
  Top 0.2: M1.J2.1 171.89,73 163,73 157,79 123,79 121,77 117,77 115.5,78.5 ADC.8
N$72
  Top 0.2: R2_9.2 125,39.5 129,39.5 R2_8.1
N$73
  Top 0.2: R2_10.1 122.5,44 122.5,45.5 123,46 129.5,46 131,44.5 131,44 130.5,44 R2_7.2
N$74
  Top 0.2: PAD17.1 173.25,88.54 173.25,84.53 M1.J7.7
N$75
  Top 0.2: PAD18.1 171.06,88.47 171.06,85.02 171.04,84.86 M1.J7.6
N$76
  Top 0.2: PAD19.1 167.48,87.19 167.48,83.95 M1.J7.5
N$77
  Top 0.2: M1.J7.4 164.9,85.16 165.5,85.76 165.5,86.48 PAD20.1
N$78
  Top 0.2: M1.J7.3 162.36,87.17 PAD35.1
N$79  (via drill 0.4)
  Top 0.2: 121.21,11.25 121.14,11.25 118.93,9.03 WHT_STN.2 | C27.1 126.39,11.25 121.21,11.25 | NO_CONNECTION_2.1 104.5,22 104.5,21 106.5,19 v111,19 | 121.21,11.25 121.21,11.29 118.5,14 R1_2.2 118.5,14.5 118.5,15.5 v115,19
  Bottom 0.2: v111,19 v115,19
N$82  (via drill 0.3)
  Top 0.2: v106.5,25.5 106.5,22.5 NO_CONNECTION_2.2 | 123,42.5 123,39.5 R2_9.1 | 123,42.5 123.5,42.5 124.5,43.5 R2_10.2 | 123,42.5 121.5,42.5 116,48 116,51 ADC.3 | v116.5,25.5 120,25.5 C35.1
  Bottom 0.2: 106.5,35.5 106.5,41.5 115,50 115,51 ADC.3 | 106.5,35.5 v106.5,25.5 | 106.5,35.5 v116.5,25.5
N$83  (via drill 0.3)
  Top 0.2: C25.1 110.5,12 110.5,16.5 C24.1 | WHT_STN.4 123.5,7 122,5.5 116,5.5 110,11.5 C25.1 | 111.5,46 111.4,46 110.5,46.9 110.5,51 ADC.1 | R2_4.2 110.5,43.5 110.5,45 111.5,46 | 111.5,46 113.5,46 115.5,44 C22.1 115.5,43.5 115.5,39 116,39 C23.1 | OPAMP.5 115,25.5 115,28 115.35,28.85 C21.1 116,29.5 116,38.5 C23.1 | C23.1 116.5,38.5 116.5,37.5 120,34 121.88,34 122.99,32.89 123.05,32.95 | R2_8.2 131,39 131,37 129,35 127,35 126.03,34.03 124.13,34.03 123.05,32.95 | 124.49,29.49 124.5,29.5 131,29.5 131,28.5 VOLTAGE_REFERENCE.5 | 124.49,29.49 v124,29 | 124.49,29.49 123.05,30.93 123.05,32.95 | NC3.1 110,12 C25.1
  Bottom 0.2: v124,29 124,7.5 WHT_STN.4
PWR_SWITCH  (via drill 0.35)
  Top 0.2: v48,58 66.09,76.09 Q1.4
  Bottom 0.2: AND.6 42.67,56.89 43.91,58.13 47.87,58.13 v48,58
SG_ALER_AL
  Bottom 0.2: 175.06,82.77 | 175.06,82.77 175.06,77.81 166.13,68.88 166.13,15.1 STRAIN_GAUGE.2 | M1.J7.8 175.06,82.77
SOURCE
  Top 2: D_PWR_OUT.2 68.25,80.92 Q1.1 Q1.2 69.26,77.94
TORQUE_I_OUT
  Top 0.2: M2.J6.7 19.5,40.5 19.5,40 18.5,39 18.5,25 14,20.5 14,4.03 15.03,3 26.88,3 TORQUE.2
TORQUE_V_OUT_[0/+5]
  Top 0.2: M2.J6.8 22.5,40.5 34.89,28.11 34.89,20.39 32.5,18 32.5,17.5 R6.2 32,17.5 29.5,17.5 R4.1 29,17 29,14 27.5,12.5 27.5,12.39 R5.1
TORQUE_V_OUT_[-5/+5]
  Top 0.2: TORQUE.1 32,5.62 32,9.31 34.12,11.43 R7.2
TS_DISCONNECT  (via drill 0.3)
  Top 0.2: XOR.3 11.5,64.5 12.5,63.5 12.5,53 19.5,53 20,53.5 23.5,53.5 26,56 26,63 28,65 NC_PU2.1 28.5,65.5 28.5,66 v29.5,67
  Bottom 0.2: v29.5,67 36.5,67 AND.2
TS_OOR
  Top 0.2: NC_PU3.1 28.5,70 29.5,71 33.77,71 35.18,69.59 AND.1 37.91,69.59 39.5,68 STRAIN.2
VCCINT4  (via drill 0.3)
  Top 0.2: C26.1 127.47,20.03 127.5,20 123.5,16 123.5,15 R1_1.2 123,14.5 v122,14.5 | v109.5,14.5 105.5,14.5 104.66,15.34 NO_CONNECTION.1
  Bottom 0.2: v109.5,14.5 114,14.5 118,10.5 | 118,10.5 121,7.5 WHT_STN.3 | 118,10.5 v122,14.5